# Altium PCB Board_MCU_v7.PcbDoc
Units mm, origin at the board's own origin, x right, y up, seen from the top; angles counter-clockwise.
Board outline 46.23 x 41.91 mm, 2 copper layers (Top Layer, Bottom Layer); 124 components, 95 nets, 381 pads, 5 vias.
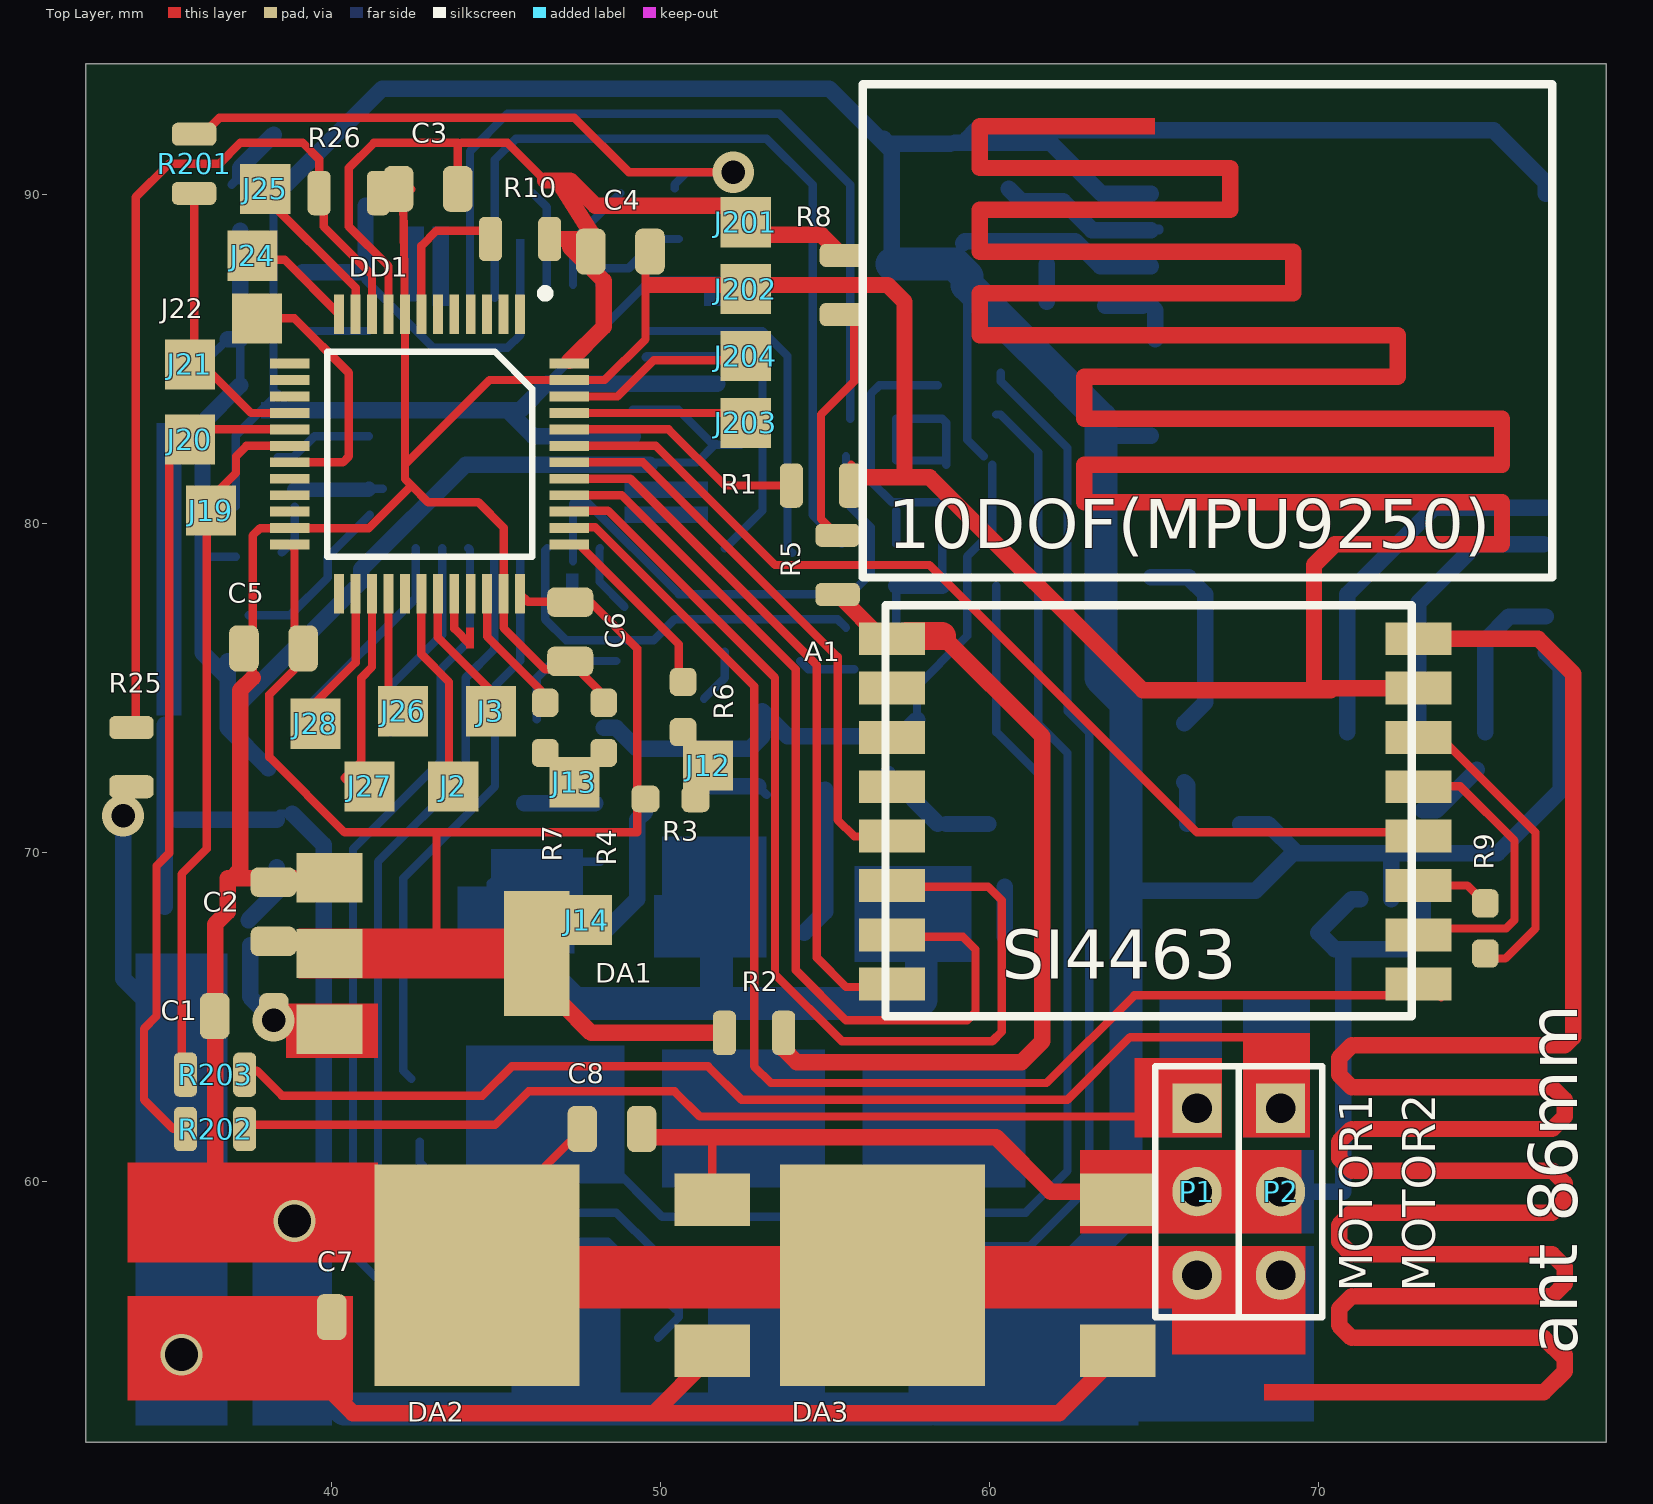
[diagram p0: Top Layer view]
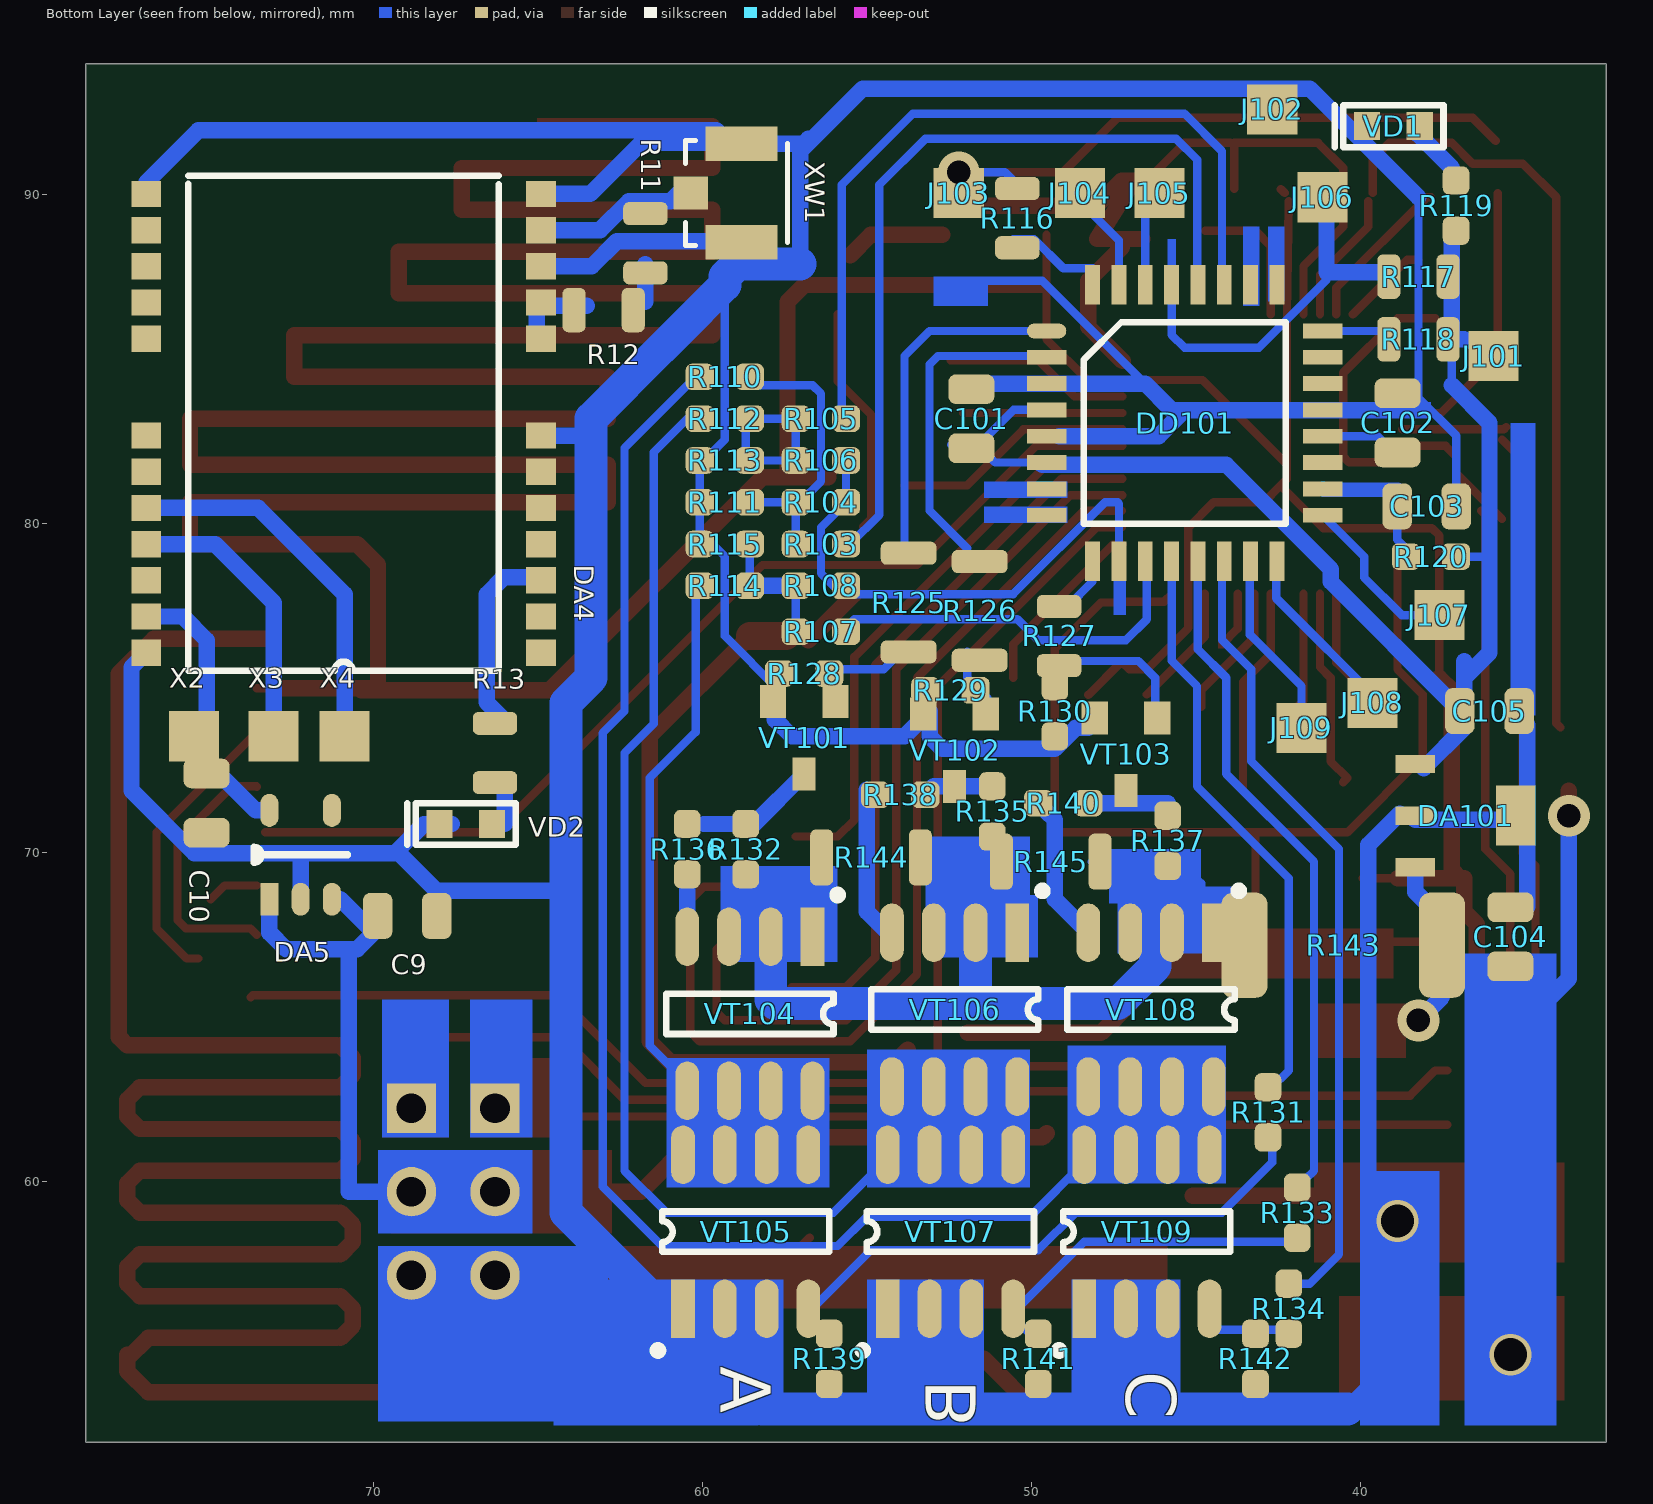
[diagram p1: Bottom Layer view, seen from below]
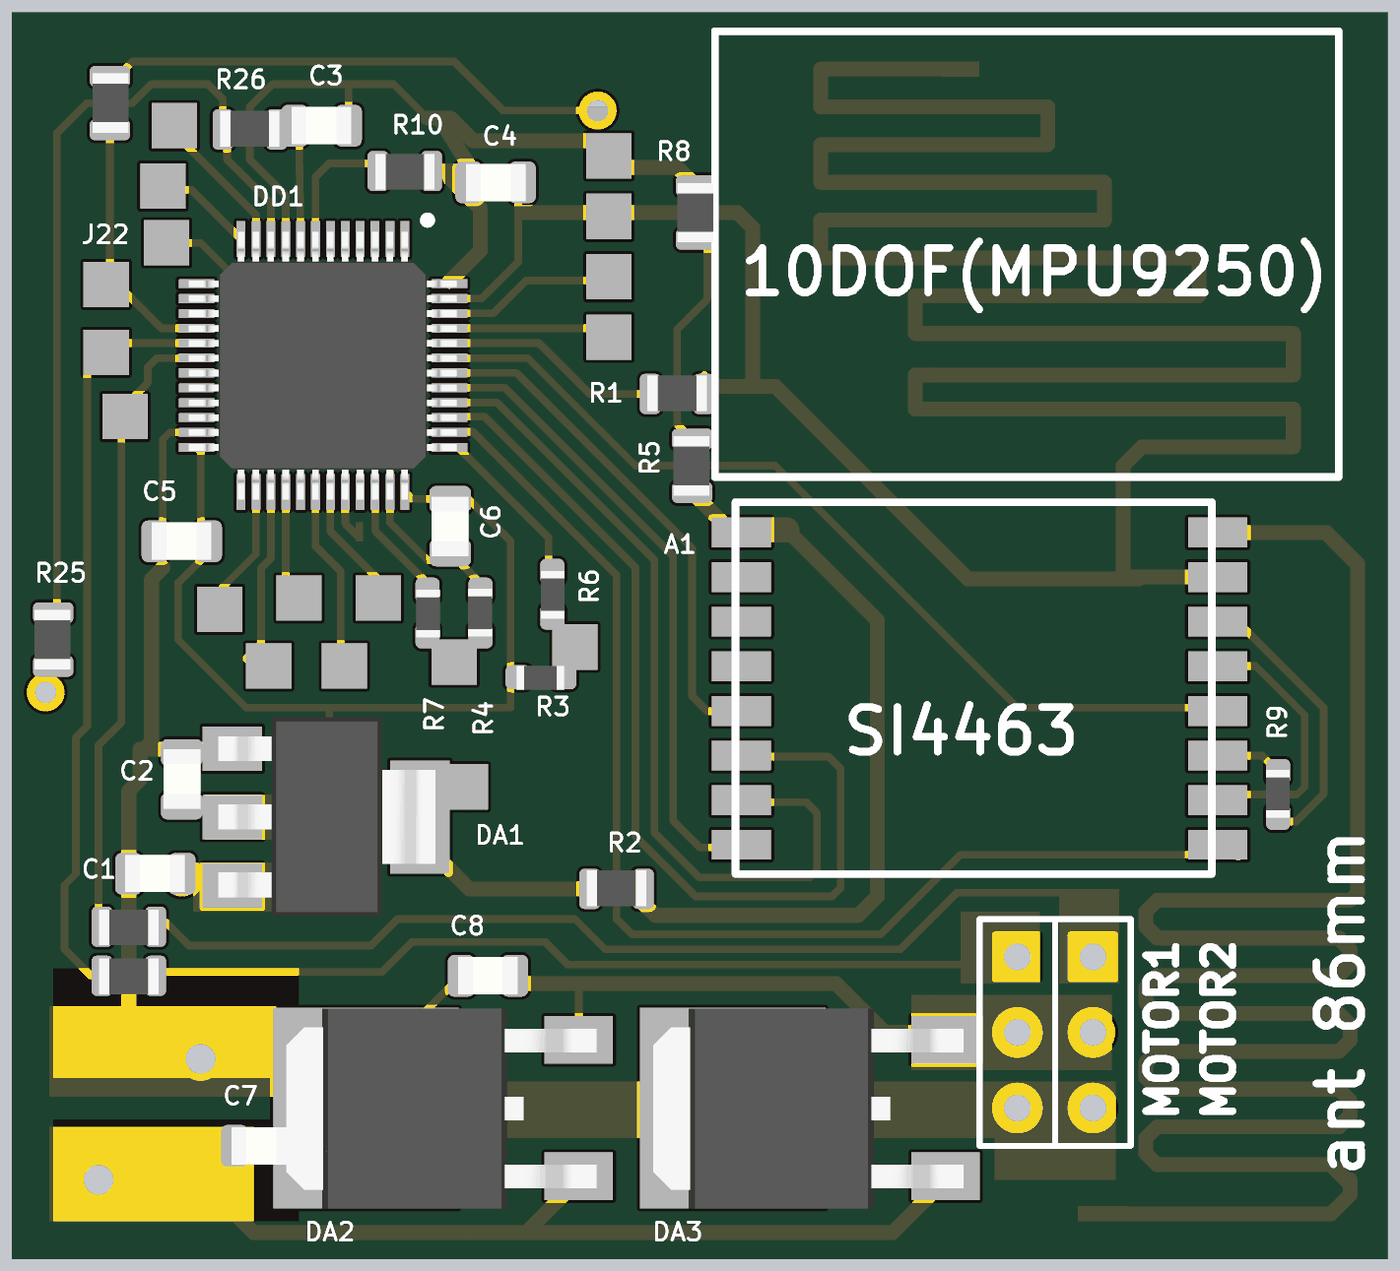
[diagram p2: 3D render of the assembled board from above, using the file's embedded part models]
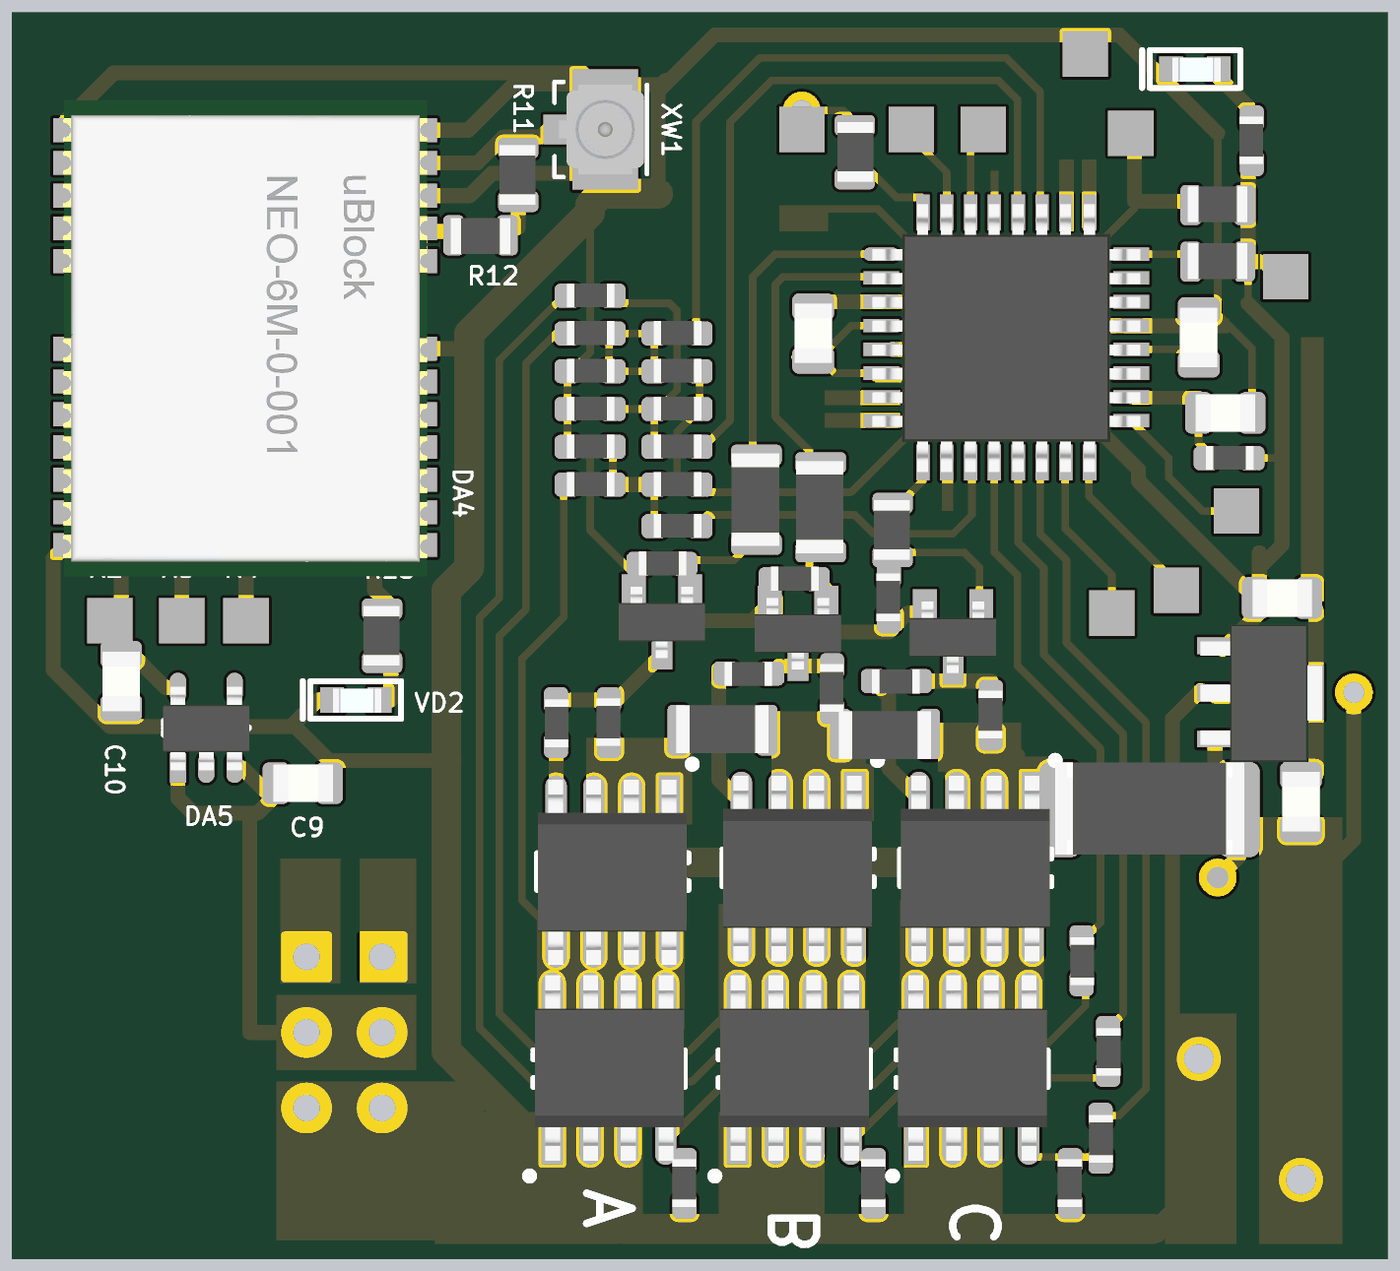
[diagram p3: 3D render of the assembled board from below, using the file's embedded part models]

## Layer stack, top to bottom
Top Layer: signal copper 0.0356
Dielectric: dielectric 0.32, FR-4, Dk 4.8
Bottom Layer: signal copper 0.0356

## Board outline
32.512,52.07 32.512,93.98 78.74,93.98 78.74,52.07

## Design rules (kind name [scope] priority, off if disabled: settings)
Clearance [All] p1: gap=0.1
ComponentClearance [All] p1 off: gap=0.254 collisioncheckmode=3 verticalgap=0.254 showdistances=FALSE
MinimumSolderMaskSliver [All] p1 off: minsoldermaskwidth=0.05
PolygonConnect [All] p1: connectstyle=Relief reliefconductorwidth=0.254 reliefentries=4 polygonreliefangle="90 Angle"
RoutingVias [All] p1: holewidth=0.711 width=1.27 viastyle="Through Hole" minholewidth=0.711 minwidth=1.27 maxholewidth=0.711 maxwidth=1.27
SilkToSilkClearance [All] p1 off: silktosilkclearance=0.254
SilkscreenOverComponentPads [IsPad] p1 off: minsilkscreentomaskgap=0.254
SolderMaskExpansion [All] p1: expansion=0.102
TestPointUsage [All] p1: valid=0 allowmultiple=FALSE
Testpoint [All] p1: side=3 testpointundercomponent=TRUE minsize=1.016 maxsize=2.54 preferedsize=1.524 minholesize=0 maxholesize=1.016 preferedholesize=0.813 testpointgrid=0.025 style=297 order=0123456789
Width [All] p1: maxlimit=2 minlimit=0.254 preferedwidth=0.5
20 further rules are at their usual default settings.

## Classes and differential pairs
component class ESC: C101 C102 C103 C104 C105 DA101 DD101 J101 J102 J103 J104 J105 J106 J107 J108 J109 R103 R104 R105 R106 R107 R108 R110 R111 R112 R113 R114 R115 R116 R117 R118 R119 R120 R125 R126 R127 R128 R129 R130 R131 R132 R133 R134 R135 R136 R137 R138 R139 R140 R141 R142 R143 R144 R145 VD1 VT101 VT102 VT103 VT104 VT105 VT106 VT107 VT108 VT109
component class Board_MCU: A1 C1 C2 C3 C4 C5 C6 DA1 DD1 J2 J3 J12 J13 J14 J19 J20 J21 J22 J24 J25 J26 J27 J28 J201 J202 J203 J204 P1 P2 R1 R2 R3 R4 R5 R6 R7 R8 R9 R10 R25 R26 R201 R202 R203
component class BatteryProtection: C7 C8 C9 C10 DA2 DA3 DA4 DA5 R11 R12 R13 VD2 X2 X3 X4 XW1

## Components (designator, comment, footprint, x,y, rotation, side; value= is the part's Value field where it differs from the comment)
A1 "Module SI4463" MODULE_SI44663 65.024,71.247 r0 top
C1 "1uF" CAP0805 37.338,65.024 r180 top
C2 "1uF" CAP0805 38.227,68.199 r90 top
C3 "0.1uF" CAP0805 42.926,90.17 r180 top
C4 "0.1uF" CAP0805 48.768,88.265 r0 top
C5 "0.1uF" CAP0805 38.227,76.2 r180 top
C6 "0.1uF" CAP0805 47.244,76.708 r270 top
C7 "0.33uF" CAP0805 40.894,55.88 r0 top
C8 "0.1uF" CAP0805 48.514,61.595 r180 top
C9 "0.1uF" CAP0805 68.961,68.072 r180 bottom
C10 "0.1uF" CAP0805 75.057,71.501 r270 bottom
C101 "0.1uF" CAP0805 51.816,83.185 r90 bottom
C102 "0.1uF" CAP0805 38.862,83.058 r270 bottom
C103 "0.1uF" CAP0805 37.973,80.518 r180 bottom
C104 "0.1uF" CAP0805 35.433,67.437 r90 bottom
C105 "0.1uF" CAP0805 36.068,74.295 r180 bottom
DA1 "AMS1117-3.3" SOT-223 46.228,66.929 r270 top
DA2 "L78L05" TO-252AA 51.562,57.15 r90 top
DA3 "L78L05" TO-252AA 63.881,57.15 r90 top
DA4 "DA-NEO-6M" NEO-6M 64.897,76.073 r0 bottom
DA5 "LP2985AIM-3.3" SOT-23 73.152,68.58 r90 bottom
DA101 "L78L05" SOT89 37.719,71.12 r270 bottom
DD1 "STM32F103C8T6" STM32L151C 45.72,86.36 r270 top
DD101 "ATmega8a" ATMEGA8A 49.53,85.852 r180 bottom
J2 "X-Socket" Socket 43.688,72.009 r0 top
J3 "X-Socket" Socket 44.831,74.295 r0 top
J12 "X-Socket" Socket 51.435,72.644 r0 top
J13 "X-Socket" Socket 47.371,72.136 r0 top
J14 "X-Socket" Socket 47.752,67.945 r0 top
J19 "X-Socket" Socket 36.322,80.391 r0 top
J20 "X-Socket" Socket 35.687,82.55 r0 top
J21 "X-Socket" Socket 35.687,84.836 r0 top
J22 "X-Socket" Socket 37.719,86.233 r90 top
J24 "X-Socket" Socket 37.592,88.138 r0 top
J25 "X-Socket" Socket 37.973,90.17 r0 top
J26 "X-Socket" Socket 42.164,74.295 r0 top
J27 "X-Socket" Socket 41.148,72.009 r0 top
J28 "X-Socket" Socket 39.497,73.914 r0 top
J101 "X-Socket" Socket 35.941,85.09 r180 bottom
J102 "X-Socket" Socket 42.672,92.583 r180 bottom
J103 "X-Socket" Socket 52.197,90.043 r180 bottom
J104 "X-Socket" Socket 48.514,90.043 r180 bottom
J105 "X-Socket" Socket 46.101,90.043 r270 bottom
J106 "X-Socket" Socket 41.148,89.916 r90 bottom
J107 "X-Socket" Socket 37.592,77.216 r270 bottom
J108 "X-Socket" Socket 39.624,74.549 r270 bottom
J109 "X-Socket" Socket 41.783,73.787 r0 bottom
J201 "X-Socket" Socket 52.578,89.154 r90 top
J202 "X-Socket" Socket 52.578,87.122 r90 top
J203 "X-Socket" Socket 52.578,83.058 r90 top
J204 "X-Socket" Socket 52.578,85.09 r90 top
P1 "Header 3" HDR1X3 66.294,62.23 r270 top
P2 "Header 3" HDR1X3 68.834,62.23 r270 top
R1 "10k" RES0805 54.864,81.153 r0 top
R2 "0" RES0805 52.832,64.516 r0 top
R3 "10k N/C" RES0603 50.292,71.628 r180 top
R4 "10k N/C" RES0603 48.26,73.787 r90 top
R5 "0" RES0805 55.372,78.74 r90 top
R6 "150" RES0603 50.673,74.422 r270 top
R7 "150" RES0603 46.482,73.787 r270 top
R8 "0" RES0805 55.499,87.249 r90 top
R9 "0" RES0603 75.057,67.691 r90 top
R10 "1k" RES0805 45.72,88.646 r180 top
R11 "10k" RES0805 61.722,88.519 r90 bottom
R12 "10k" RES0805 62.992,86.487 r0 bottom
R13 "10k" RES0805 66.294,73.025 r90 bottom
R25 "10k" RES0805 33.909,72.898 r90 top
R26 "1k" RES0805 40.513,90.043 r0 top
R103 "33k" RES0603 56.388,79.375 r180 bottom
R104 "33k" RES0603 56.388,80.645 r180 bottom
R105 "33k" RES0603 56.388,83.185 r180 bottom
R106 "33k" RES0603 56.388,81.915 r180 bottom
R107 "33k" RES0603 56.388,76.708 r180 bottom
R108 "33k" RES0603 56.388,78.105 r180 bottom
R110 "33k" RES0603 59.309,84.455 r180 bottom
R111 "12k" RES0603 59.309,80.645 r180 bottom
R112 "33k" RES0603 59.309,83.185 r180 bottom
R113 "12k" RES0603 59.309,81.915 r180 bottom
R114 "33k" RES0603 59.309,78.105 r180 bottom
R115 "12k" RES0603 59.309,79.375 r180 bottom
R116 "100" RES0805 50.419,89.281 r270 bottom
R117 "10k" RES0805 38.227,87.503 r180 bottom
R118 "10k" RES0805 38.227,85.598 r180 bottom
R119 "1k" RES0603 37.084,89.662 r90 bottom
R120 "100" RES0603 37.846,78.994 r180 bottom
R125 "0" RES1206 53.721,77.597 r90 bottom
R126 "0" RES1206 51.562,77.343 r90 bottom
R127 "0" RES0805 49.149,76.581 r90 bottom
R128 "10K" RES0603 56.896,75.438 r180 bottom
R129 "10K" RES0603 52.451,74.93 r180 bottom
R130 "10K" RES0603 49.276,74.295 r90 bottom
R131 "100" RES0603 42.799,62.103 r270 bottom
R132 "2k" RES0603 58.674,70.104 r90 bottom
R133 "100" RES0603 41.91,59.055 r270 bottom
R134 "100" RES0603 42.164,56.134 r270 bottom
R135 "2k" RES0603 51.181,71.247 r90 bottom
R136 "100" RES0603 60.452,70.104 r270 bottom
R137 "2k" RES0603 45.847,70.358 r90 bottom
R138 "100" RES0603 53.975,71.755 r0 bottom
R139 "10K" RES0603 56.134,54.61 r90 bottom
R140 "100" RES0603 49.022,71.501 r0 bottom
R141 "10K" RES0603 49.784,54.61 r90 bottom
R142 "10K" RES0603 43.18,54.61 r90 bottom
R143 "0" RES2512 40.513,67.183 r180 bottom
R144 "0" RES1206 54.864,69.85 r180 bottom
R145 "0" RES1206 49.403,69.723 r0 bottom
R201 "1k" RES0805 35.814,90.932 r270 top
R202 "1k" RES0805 36.449,61.595 r180 top
R203 "1k" RES0805 36.449,63.246 r180 top
VD1 "KP-1608SURC" "DIODE 1608" 38.989,92.075 r180 bottom
VD2 "KP-1608SURC" "Diode 1608" 67.183,70.866 r180 bottom
VT101 "2N7002" SOT23 56.896,72.39 r0 bottom
VT102 "2N7002" SOT23 52.324,72.009 r0 bottom
VT103 "2N7002" SOT23 47.117,71.882 r0 bottom
VT104 "IRF9310PbF" "SO-8 IRF..." 56.642,67.437 r270 bottom
VT105 "IRF8736PbF" "SO-8 IRF..." 60.579,56.134 r90 bottom
VT106 "IRF9310PbF" "SO-8 IRF..." 50.419,67.564 r270 bottom
VT107 "IRF8736PbF" "SO-8 IRF..." 54.356,56.134 r90 bottom
VT108 "IRF9310PbF" "SO-8 IRF..." 44.45,67.564 r270 bottom
VT109 "IRF8736PbF" "SO-8 IRF..." 48.387,56.134 r90 bottom
X2 "X-Socket" Socket 75.438,73.533 r180 bottom
X3 "X-Socket" Socket 73.025,73.533 r180 bottom
X4 "X-Socket" Socket 70.866,73.533 r180 bottom
XW1 "X-MMCX Connector Jack" X-MMCX 58.801,90.043 r90 bottom

## Footprints (in the part's own frame and the unit in brackets; to place one, negate y for a bottom-side part, rotate by r counter-clockwise, add the part's x,y. Pads: shape width x height; smd on the part's side, far side on the other; paste and mask are expansions set on the pad)
ATMEGA8A [mm]
  oval 1.2x0.45 smd: 1(0,0)
  rect 1.2x0.45 smd: 2(0,-0.8) 3(0,-1.6) 4(0,-2.4) 5(0,-3.2) 6(0,-4) 7(0,-4.8) 8(0,-5.6) 17(8.4,-5.6) 18(8.4,-4.8) 19(8.4,-4) 20(8.4,-3.2) 21(8.4,-2.4) 22(8.4,-1.6) 23(8.4,-0.8) 24(8.4,0)
  rect 0.45x1.2 smd: 9(1.4,-7) 10(2.2,-7) 11(3,-7) 12(3.8,-7) 13(4.6,-7) 14(5.4,-7) 15(6.2,-7) 16(7,-7) 25(7,1.4) 26(6.2,1.4) 27(5.4,1.4) 28(4.6,1.4) 29(3.8,1.4) 30(3,1.4) 31(2.2,1.4) 32(1.4,1.4)
  silkscreen extent 1.13,-5.87 7.27,0.27, body extent -0.3,-7.32 8.7,1.68, height 1.6
CAP0805 [mm]
  rrect50% 0.9x1.4 smd: 1(-0.9,0) 2(0.9,0)
  body extent -0.99,-0.63 1.01,0.62, height 1.3
"DIODE 1608" [mm]
  rect 0.8x0.85 smd: 1(-0.8,0) 2(0.8,0)
  silkscreen extent -1.78,-0.64 1.52,0.64, body extent -0.77,-0.42 0.85,0.38, height 1.1
"Diode 1608" [mm]
  rect 0.8x0.85 smd: 1(-0.8,0) 2(0.8,0)
  silkscreen extent -1.78,-0.64 1.52,0.64, body extent -0.77,-0.42 0.85,0.38, height 1.1
HDR1X3 [mm] "Connector; Header; 3 Position"
  rect 1.5x1.5 hole 0.9: 1(0,0)
  round 1.5 hole 0.9: 2(2.54,0) 3(5.08,0)
  silkscreen extent -1.27,-1.27 6.35,1.27
MODULE_SI44663 [mm]
  rect 2x1 smd: 1(-8,5.25) 2(-8,3.75) 3(-8,2.25) 4(-8,0.75) 5(-8,-0.75) 6(-8,-2.25) 7(-8,-3.75) 8(-8,-5.25) 9(8,-5.25) 10(8,-3.75) 11(8,-2.25) 12(8,-0.75) 13(8,0.75) 14(8,2.25) 15(8,3.75) 16(8,5.25)
  silkscreen extent -8.2,-6.23 7.8,6.27, body extent -8.2,-6.23 7.79,6.25, height 2
NEO-6M [mm]
  rect 0.9x0.8 smd: 1(0,0) 2(0,-1.1) 3(0,-2.2) 4(0,-3.3) 5(0,-4.4) 6(0,-5.5) 7(0,-6.6) 8(0,-9.544) 9(0,-10.644) 10(0,-11.744) 11(0,-12.844) 12(0,-13.944) 13(12,-13.944) 14(12,-12.844) 15(12,-11.744) 16(12,-10.644) 17(12,-9.544) 18(12,-6.6) 19(12,-5.5) 20(12,-4.4) 21(12,-3.3) 22(12,-2.2) 23(12,-1.1) 24(12,0)
  silkscreen extent 1.28,-14.49 10.72,0.55, body extent -0.12,-14.95 12.1,1.05, height 2.4
RES0603 [mm]
  rrect50% 0.86x0.81 smd: 1(-0.762,0) 2(0.762,0)
  body extent -0.78,-0.38 0.82,0.42, height 0.45
RES0805 [mm]
  rrect50% 0.7x1.35 smd: 1(-0.9,0) 2(0.9,0)
  body extent -1,-0.58 1,0.62, height 0.5
RES1206 [mm]
  rrect50% 0.7x1.7 smd: 1(-1.5,0) 2(1.5,0)
  body extent -1.55,-0.76 1.55,0.84, height 0.55
RES2512 [mm]
  rrect50% 1.4x3.2 smd: 1(-3,0) 2(3,0)
  body extent -3.17,-1.52 3.18,1.58, height 0.55
"SO-8 IRF..." [mm]
  rect 1.78x0.72 smd: 1(0,0)
  oval 1.78x0.72 smd: 2(0,-1.27) 3(0,-2.54) 4(0,-3.81) 5(4.68,-3.81) 6(4.68,-2.54) 7(4.68,-1.27) 8(4.68,0)
  silkscreen extent -1.4,-4.45 2.96,0.89, body extent -0.75,-4.42 5.48,0.58, height 1.75
Socket [mil]
  rect 60x60 smd: 1(0,0)
SOT23 [mm]
  rect 0.8x1 smd: 1(-0.95,-2.2) 2(0.95,-2.2)
  rect 0.7x1 smd: 3(0,0)
  body extent -1.44,-2.29 1.46,0.11, height 1.02
SOT89 [mm]
  rect 0.56x1.2 smd: 1(-1.57,-0.6) 2(0,-0.6) 3(1.57,-0.6)
  rect 1.83x1.2 smd: 2(0,2.45)
  body extent -2.27,-1.09 2.33,3.01, height 1.6
SOT-23 [mm]
  rect 1x0.55 smd: 1(0,0)
  oval 1x0.55 smd: 2(0,-0.95) 3(0,-1.9) 4(2.7,-1.9) 5(2.7,0)
  silkscreen extent 1.11,-2.38 1.59,0.48, body extent -0.07,-2.4 2.73,0.5, height 1.45
SOT-223 [mm]
  rect 1.5x2 smd: 1(-2.3,-6.3) 2(0,-6.3) 3(2.3,-6.3)
  rect 3.8x2 smd: 4(0,0)
  body extent -3.36,-6.77 3.35,0.52, height 1.8
STM32L151C [mm]
  rect 1.2x0.3 smd: 1(0,0) 2(0,-0.5) 3(0,-1) 4(0,-1.5) 5(0,-2) 6(0,-2.5) 7(0,-3) 8(0,-3.5) 9(0,-4) 10(0,-4.5) 11(0,-5) 12(0,-5.5) 25(8.5,-5.5) 26(8.5,-5) 27(8.5,-4.5) 28(8.5,-4) 29(8.5,-3.5) 30(8.5,-3) 31(8.5,-2.5) 32(8.5,-2) 33(8.5,-1.5) 34(8.5,-1) 35(8.5,-0.5) 36(8.5,0)
  rect 0.3x1.2 smd: 13(1.5,-7) 14(2,-7) 15(2.5,-7) 16(3,-7) 17(3.5,-7) 18(4,-7) 19(4.5,-7) 20(5,-7) 21(5.5,-7) 22(6,-7) 23(6.5,-7) 24(7,-7) 37(7,1.5) 38(6.5,1.5) 39(6,1.5) 40(5.5,1.5) 41(5,1.5) 42(4.5,1.5) 43(4,1.5) 44(3.5,1.5) 45(3,1.5) 46(2.5,1.5) 47(2,1.5) 48(1.5,1.5)
  silkscreen extent -0.76,-5.86 7.36,0.89, body extent -0.24,-7.25 8.76,1.75, height 1.6
TO-252AA [mm]
  rect 1.6x2.3 smd: 1(-2.29,0) 3(2.29,0)
  rect 6.74x6.23 smd: 4(0,7.15)
  body extent -3.38,-0.6 3.35,9.82, height 2.38
X-MMCX [mm] "1 Position Header"
  rect 1x1.05 smd: 1(0,1.55)
  rect 1.05x2.2 smd: 2(-1.5,0) 2(1.5,0)
  silkscreen extent -1.6,-1.4 1.6,1.7, body extent -1.5,-1.3 1.5,1.55, height 1.27

## Part data
A1: library part module_SI4463
C1 C2 C3 C4 C5 C6 C7 C8 C9 C10 C101 C102 C103 C104 C105: library part Capacitor
DA1: library part DA-AMS1117, "LDO 3.3V 0.5A"
DA2 DA3: library part DA-L78M05, "LDO"
DA5: library part DA-LP2985, "LDO"
DA101: library part DA-L78L05, "LDO"
DD1: "LQFP48"
DD101: "MCU 8MHz"
P1 P2: "Header, 3-Pin"
R1 R2 R3 R4 R5 R6 R7 R8 R9 R10 R11 R12 R13 R25 R26 R103 R104 R105 R106 R107 R108 R110 R111 R112 R113 R114 R115 R116 R117 R118 R119 R120 R125 R126 R127 R128 R129 R130 R131 R132 R133 R134 R135 R136 R137 R138 R139 R140 R141 R142 R143 R144 R145 R201 R202 R203: library part Resistor
VD1 VD2: library part LED_0603
VT104 VT106 VT108: "P-MOSFET -20A"
VT105 VT107 VT109: "N-MOSFET 18A"

## Via types
v1: diameter 1.27, hole 0.711, Top Layer to Bottom Layer, 3 vias
v2: diameter 1.27, hole 1, Top Layer to Bottom Layer, 2 vias

## Nets (pads, with @x,y where several pads share a name; then routed paths per layer and width w, separated by ;. In a path a pad name is that pad's centre, name@x,y a point inside that pad or via, vN(x,y) a via of type N, cw(c..) or ccw(c..) an arc to the next point about the centre after c; other vN are vias at no path point)
3V3: C2.1 C5.1 C6.1 DA1.2 DA1.4 DD1.24 DD1.36 J14.1 R2.1 R3.2 | length 42.5
  Top Layer w0.254: C2.1@38.1,67.285 39.268,67.285 DA1.2@39.497,67.056 ; DD1.24 38.862,79.218 38.862,75.565 38.1,74.803 38.1,72.898 40.386,70.612 49.276,70.612 49.276,76.2 47.879,77.597 47.269,77.597 47.244,77.622 45.958,77.622 DD1.36 ; DA1.2@39.928,66.802 43.18,66.802 ; 43.18,66.929 43.18,70.612
  Top Layer w0.5: DA1.4@46.99,65.405 47.879,64.516 R2.1
3V3_2: C3.1 C4.1 DD1.9 DD1.48 J201.1 R8.2 R10.1 | length 31.4
  Top Layer w0.254: DD1.9 41.72,87.82 40.513,89.027 40.513,90.805 41.275,91.567 43.815,91.567 43.826,91.578 C3.1 ; 43.942,91.567 45.339,91.567 46.482,90.424 ; 47.244,88.392 C4.1@47.879,88.646 ; C4.1@47.752,88.773 47.625,88.646 C4.1@47.99,88.646
  Top Layer w0.5: R10.1 C4.1@47.879,88.646 ; DD1.48@47.22,84.939 48.26,85.979 48.26,87.376 47.244,88.392 ; C4.1@47.99,88.646 46.879,90.424 46.482,90.424 47.244,90.424 48.006,89.662 J201.1@52.197,89.662 ; J201.1@52.705,88.773 54.875,88.773 R8.2
5V_OUT: C101.1 C105.1 DA101.1 DD101.4 DD101.6 J101.1 R117.2 R118.2 R119.1 R120.2 | length 42.8
  Bottom Layer w0.254: 36.068,78.994 R120.2 ; J101.1@36.195,84.963 36.83,85.598 ; 37.211,84.201 37.211,85.598 R118.2 ; DD101.6@49.149,81.852 DD101.6 51.093,81.852 C101.1@51.664,82.423 ; DD101.4@49.149,83.452 50.533,83.452 C101.1@51.613,82.372 ; C101.1@51.689,82.398 C101.1@52.426,82.398
  Bottom Layer w0.5: 36.83,75.311 36.068,76.073 36.068,78.994 36.068,83.058 37.211,84.201 ; 36.83,75.819 36.83,73.798 DA101.1@38.065,72.563 ; 36.83,85.598 37.211,85.598 R119.1@37.211,88.9 ; C105.1@37.084,74.422 40.894,78.232 40.894,78.613 44.069,81.788 DD101.6@49.657,81.788
"+ BATT_OUT": C1.1 C7.1 C104.1 DA1.3 DA2.1 DA3.1 DA101.3 R25.1 R143.2 | length 42.5
  Top Layer w0.254: DA1.3@40.132,64.389 DA1.3@40.513,64.008
  Top Layer w0.5: v1(33.655,71.12) R25.1@33.655,71.882 ; 40.005,53.594 40.64,52.959 62.103,52.959 DA3.1@64.325,55.181 ; 49.784,52.959 51.435,54.61 DA2.1@51.562,54.61
  Bottom Layer w0.5: v1(33.655,71.12) 33.655,66.167 34.925,64.897 34.925,63.754 ; v2(35.433,54.737) 35.814,54.737 35.941,54.864 35.941,55.118 ; R143.2@37.465,67.945 38.319,68.799 DA101.3 ; R143.2 37.513,65.611 v1(38.227,64.897)
"- BATT_OUT": A1.15 C1.2 C2.2 C3.2 C4.2 C5.2 C6.2 C7.2 C8.2 C9.2 C10.2 C101.2 C102.1 C103.2 C104.2 C105.2 DA1.1 DA2.4 DA3.4 DA4.7 DA4.10 DA4.12 DA4.13 DA4.24 DA5.2 DA101.2 DD1.8 DD1.23 DD1.35 DD1.47 DD101.3 DD101.5 DD101.21 J102.1 J202.1 P1.3 P2.3 R1.2 R4.2 R26.2 R111.1 R113.1 R115.1 R128.1 R129.1 R130.1 R139.1 R141.1 R142.1 VD1.1 VD2.1 VT101.2 VT102.2 VT103.2 VT105.1 VT105.2 VT105.3 VT107.1 VT107.2 VT107.3 VT109.1 VT109.2 VT109.3 XW1.2 | length 478.2
  Top Layer w0.254: 37.592,75.311 37.592,79.629 37.823,79.86 DD1.23 41.125,79.86 42.418,81.153 ; v2@38.862,58.547 v2(38.862,58.801) ; DA1.1@38.964,69.215 DA1.1@39.928,69.215 ; C3.2@42.164,89.789 DD1.8 42.22,81.788 ; C3.2@42.291,90.043 C3.2@42.407,90.159 ; DA2.4@46.355,60.325 46.355,60.336 C8.2 ; C6.2@47.244,75.794 47.015,75.565 46.482,75.565 45.22,76.827 DD1.35 45.22,79.875 44.45,80.645 42.926,80.645 42.418,81.153 ; C6.2 R4.2@48.26,74.792 ; C4.2@49.53,88.773 49.53,85.598 48.292,84.36 DD1.47 44.792,84.36 42.22,81.788 ; R1.2@55.778,81.788 56.159,81.407 ; DA3.4@56.731,58.293 57.62,57.404 P2.3@68.453,57.404 ; A1.15 A1.15@73.532,74.997 ; 42.22,81.788 42.22,81.351 42.418,81.153
  Top Layer w0.5: 36.449,60.071 36.449,67.818 36.83,68.199 36.83,69.215 C2.2@38.862,69.215 ; 36.957,69.215 37.211,69.469 37.211,74.93 37.592,75.311 ; 39.624,59.563 DA2.4@45.085,59.563 ; DA2.4@46.99,57.404 DA3.4@58.674,57.404 ; 49.657,87.249 J202.1@52.705,87.249 ; J202.1@52.959,87.249 56.896,87.249 57.404,86.741 57.404,81.534 ; 56.159,81.407 58.166,81.407 64.643,74.93 70.358,74.93 ; 64.77,92.075 59.69,92.075 59.69,90.805 67.31,90.805 67.31,89.535 59.69,89.535 59.69,88.265 69.215,88.265 69.215,86.995 59.69,86.995 59.69,85.725 72.39,85.725 72.39,84.455 62.865,84.455 62.865,83.185 75.565,83.185 75.565,81.788 62.865,81.788 62.865,80.645 75.565,80.645 75.565,79.375 70.485,79.375 69.85,78.74 69.85,75.057 ; 70.044,74.997 A1.15
  Bottom Layer w0.254: C103.2 37.073,82.666 C102.1@38.227,83.82 ; 38.227,89.916 C102.1@38.227,83.82 ; DA101.2@38.417,71.183 DA101.2@38.798,71.183 ; C102.1@38.608,83.82 38.481,83.82 38.354,83.947 C102.1@38.227,83.82 ; 38.862,83.452 DD101.21 45.733,83.452 ; 46.494,84.252 46.533,84.252 49.657,87.376 52.451,87.376 ; VT107.3 VT107.2 VT107.1 ; VT101.2@57.658,74.93 59.309,76.581 59.309,78.994 60.071,79.756 R111.1 R113.1@60.071,81.788 ; 57.785,74.041 VT101.2@57.785,74.676 ; 59.309,87.249 59.309,82.55 R113.1@59.817,82.042
  Bottom Layer w0.5: C104.2@34.925,68.351 C105.2@34.925,73.889 ; DA101.2@35.269,70.993 DA101.2@38.319,70.993 ; 38.227,89.916 41.529,93.218 55.118,93.218 57.023,91.313 57.023,87.884 ; DA101.2@38.798,71.183 39.751,70.231 39.751,53.721 40.386,53.086 ; 45.339,83.439 46.126,82.652 DD101.5@49.149,82.652 ; 45.733,83.452 46.533,84.252 C101.2@51.715,84.252 ; VT103.2@48.26,73.787 48.641,73.787 49.276,73.152 52.705,73.152 53.086,73.533 53.086,74.295 53.848,73.533 57.277,73.533 57.785,74.041 ; 56.769,91.694 56.92,91.543 XW1.2@58.801,91.543 ; XW1.2@58.928,91.567 61.849,91.567 63.399,90.017 DA4.12 ; XW1.2@59.182,88.519 59.236,88.573 62.597,88.573 63.353,87.817 DA4.10 ; XW1.2@59.309,91.694 59.563,91.948 75.311,91.948 76.897,90.362 DA4.13 ; 63.373,82.677 63.377,82.673 DA4.7 ; 63.881,68.834 68.072,68.834 69.215,69.977 69.342,69.977 ; VD2.1@67.602,70.866 68.453,70.866 69.342,69.977 ; DA5.2 72.202,69.916 72.263,69.977 ; DA4.24 77.343,75.627 77.343,71.882 75.438,69.977 72.263,69.977 ; 69.342,69.977 72.263,69.977
  Bottom Layer w1: 40.386,53.086 58.166,53.086 64.135,59.055 64.135,74.549 63.373,75.311 63.373,82.677 63.373,83.185 61.219,85.339 61.215,85.339 60.761,85.793 60.761,85.797 59.309,87.249 ; 57.023,87.884 58.928,87.884 59.309,87.503
ADC_0: DD101.10 R104.2 R106.2 R108.2 | length 15.5
  Bottom Layer w0.254: DD101.10 47.33,80.604 47.371,80.645 47.752,80.645 50.546,77.851 R108.2@55.499,77.851 ; R104.2 R106.2 R106.2@55.626,82.042 ; R104.2@55.753,80.518 56.388,79.883 56.388,78.486 R108.2@55.88,77.978
ADC_1: DD101.11 R107.2 | length 12
  Bottom Layer w0.254: DD101.11@46.549,79.252 46.482,79.185 46.482,77.089 47.117,76.454 49.784,76.454 50.419,77.089 55.372,77.089 R107.2@55.626,76.835
ADC_2: DD101.27 R105.2 | length 24.5
  Bottom Layer w0.254: DD101.27@44.196,86.899 44.196,91.313 45.339,92.456 53.594,92.456 55.753,90.297 R105.2@55.753,83.185
ADC_3: DD101.28 R103.2 | length 26
  Bottom Layer w0.254: DD101.28@44.949,86.852 44.949,91.05 45.593,91.694 53.213,91.694 54.61,90.297 54.61,80.264 R103.2@55.499,79.375
ADCM_1: DD1.10 R25.2 R26.1 | length 27.7
  Top Layer w0.254: R25.2 34.036,73.925 34.036,89.916 35.052,90.932 36.576,90.932 37.211,91.567 39.116,91.567 39.613,91.07 R26.1 ; R26.1@39.751,89.789 39.751,89.027 41.22,87.558 DD1.10
ADCM_2: DD1.11 J25.1 | length 4.8
  Top Layer w0.254: J25.1@37.846,89.916 37.973,89.916 40.72,87.169 DD1.11
ANTENNA: A1.16 | length 86.1
  Top Layer w0.5: 68.58,53.594 76.835,53.594 77.47,54.229 77.47,54.737 ; 70.993,55.245 70.612,55.626 70.612,56.134 70.993,56.515 ; 70.993,57.785 70.612,58.166 70.612,58.674 70.993,59.055 ; 70.993,60.325 70.612,60.706 70.612,61.214 70.993,61.595 ; 70.993,62.865 70.612,63.246 70.612,63.754 70.993,64.135 ; 71.12,55.245 76.835,55.245 77.47,54.61 ; 71.12,56.515 77.089,56.515 77.47,56.896 77.47,57.404 77.089,57.785 71.12,57.785 ; 71.12,59.055 77.089,59.055 77.47,59.436 77.47,59.944 77.089,60.325 71.12,60.325 ; 71.12,61.595 77.089,61.595 77.47,61.976 77.47,62.484 77.089,62.865 71.12,62.865 ; 71.12,64.135 77.47,64.135 77.724,64.389 77.724,75.438 76.665,76.497 A1.16
I2C_CLK: DD1.45 J203.1 | length 4.9
  Top Layer w0.254: DD1.45 J203.1@52.07,83.36
I2C_SDA: DD1.46 J204.1 | length 5.7
  Top Layer w0.254: DD1.46 48.681,83.86 49.784,84.963 J204.1@52.451,84.963
MCU_BOOT0: DD1.44 R1.1 | length 7.3
  Top Layer w0.254: DD1.44 50.236,82.86 51.943,81.153 R1.1@53.848,81.153
NetA1_1: A1.1 R2.2 R5.1 | length 24.9
  Top Layer w0.5: R2.2@53.746,64.008 54.127,63.627 60.96,63.627 61.595,64.262 61.595,73.533 58.547,76.581 ; R5.1@55.372,77.851 A1.1@56.769,76.454
  Top Layer w0.85: A1.1@57.448,76.581 58.547,76.581
NetA1_10: A1.10 A1.13 | length 8.1
  Top Layer w0.254: A1.10@73.532,67.497 73.726,67.691 75.692,67.691 75.946,67.945 75.946,70.358 74.295,72.009 73.544,72.009 A1.13@73.532,71.997
NetA1_11: A1.11 R9.2 | length 1.6
  Top Layer w0.254: A1.11@73.532,68.997 74.513,68.997 R9.2@74.93,68.58
NetA1_14: A1.14 R9.1 | length 8.8
  Top Layer w0.254: A1.14@73.532,73.497 73.696,73.497 76.581,70.612 76.581,67.691 75.667,66.777 R9.1@75.311,66.777
NetC8_1: C8.1 C9.1 DA2.3 DA3.3 DA5.1 DA5.3 P1.2 P2.2 | length 36.9
  Top Layer w0.254: DA2.3@51.562,60.198 51.562,61.341
  Top Layer w0.5: C8.1@49.53,61.468 49.657,61.341 60.198,61.341 61.849,59.69 P1.2 68.326,59.69 P2.2@68.739,60.103
  Bottom Layer w0.5: P2.2 70.739,59.69 70.739,66.929 70.612,67.056 ; DA5.3 70.993,68.58 69.977,67.564 70.485,67.056 70.612,67.056 ; DA5.1 73.152,67.564 72.644,67.056 70.612,67.056
NetC10_1: C10.1 DA4.23 DA5.5 X2.1 | length 7.1
  Bottom Layer w0.5: DA5.5 73.566,71.28 C10.1@74.803,72.517 ; X2.1@75.057,73.66 75.057,76.454 75.776,77.173 DA4.23
NetC102_2: C102.2 DD101.20 | length 3
  Bottom Layer w0.254: C102.2@38.354,82.017 38.837,82.017 39.472,82.652 DD101.20
NetC103_1: C103.1 DD101.18 R120.1 | length 4.3
  Bottom Layer w0.254: R120.1@38.481,79.121 38.873,79.513 C103.1 ; DD101.18 DD101.18@41.549,81.052
  Bottom Layer w0.45: C103.1@38.862,81.026 41.104,81.026 DD101.18
NetDA4_3: DA4.3 R13.2 | length 6.1
  Bottom Layer w0.5: DA4.3@64.897,78.359 66.04,78.359 66.548,77.851 66.548,74.56 R13.2@65.913,73.925
NetDA4_8: DA4.8 DA4.9 R12.2 | length 2.6
  Bottom Layer w0.5: 63.511,86.614 64.643,86.614 64.77,86.741 65.024,86.487 DA4.8@65.024,85.598
NetDA4_11: DA4.11 R11.2 XW1.1 | length 5.1
  Bottom Layer w0.254: DA4.11@64.897,88.958 65.151,88.958 DA4.11@65.151,88.917
  Bottom Layer w0.5: XW1.1@60.579,90.17 60.96,89.789 62.23,89.789 63.102,88.917 DA4.11
NetDA4_20: DA4.20 X4.1 | length 11.3
  Bottom Layer w0.5: X4.1@70.866,73.66 70.866,77.851 73.488,80.473 DA4.20
NetDA4_21: DA4.21 X3.1 | length 8.6
  Bottom Layer w0.5: X3.1 73.025,77.597 74.803,79.375 DA4.21@76.835,79.375
NetDD1_7: DD1.7 R10.2 | length 4.3
  Top Layer w0.254: DD1.7 42.72,88.44 43.18,88.9 R10.2@44.704,88.9
NetDD1_26: DD1.26 J28.1 | length 4
  Top Layer w0.254: J28.1@39.37,74.422 40.72,75.772 DD1.26
NetDD1_27: DD1.27 J27.1 | length 6.1
  Top Layer w0.254: J27.1@40.513,72.136 40.386,72.263 40.894,72.771 40.894,75.311 41.22,75.637 DD1.27
NetDD1_28: DD1.28 J26.1 | length 3.7
  Top Layer w0.254: DD1.28 41.72,74.612 J26.1@42.037,74.295
NetDD101_24: DD101.24 R118.1 | length 1.9
  Bottom Layer w0.254: R118.1@39.243,85.852 DD101.24
NetJ12_1: J12.1 R3.1 R6.2
NetJ13_1: J13.1 R4.1 R7.2
NetJ103_1: J103.1 R116.1 R201.1 | length 19.3
  Top Layer w0.254: R201.1@35.877,91.63 36.576,92.329 47.371,92.329 49.022,90.678 v1(52.197,90.678)
  Bottom Layer w0.254: R116.1 50.419,90.297 50.8,90.678 v1(52.197,90.678)
NetP1_1: P1.1 R202.1 | length 29.6
  Top Layer w0.254: R202.1@37.349,61.722 44.958,61.722 45.974,62.738 50.419,62.738 51.181,61.976 65.278,61.976 P1.1@65.913,62.611
NetP2_1: P2.1 R203.1 | length 34.6
  Top Layer w0.254: R203.1@37.349,63.373 37.719,63.373 38.481,62.611 44.577,62.611 45.466,63.5 51.435,63.5 52.451,62.484 62.357,62.484 64.262,64.389 67.945,64.389 68.707,63.627 68.707,62.992 P2.1@68.453,62.738
NetR5_2: R5.2 R8.1 | length 7
  Top Layer w0.254: R5.2@55.105,79.896 54.864,80.137 54.864,83.312 55.88,84.328 R8.1@55.88,86.36
NetR11_1: R11.1 R12.1 | length 1.1
  Bottom Layer w0.5: 61.722,86.741 R11.1@61.722,87.873
NetR13_1: R13.1 VD2.2 | length 1.3
  Bottom Layer w0.5: R13.1@65.913,72.136 66.002,72.047 VD2.2@66.002,70.866
NetR103_1: R103.1 R104.1 R110.2 R111.2 | length 8.2
  Bottom Layer w0.254: R103.1 R104.1@57.15,80.391 ; R110.2@58.42,84.201 56.642,84.201 56.388,83.947 56.388,81.28 57.023,80.645 R104.1 R111.2@58.522,80.645
NetR105_1: R105.1 R106.1 R112.2 R113.2 | length 5.5
  Bottom Layer w0.254: R113.2 R106.1 R105.1 R112.2 58.674,83.058 R113.2@58.674,81.788
NetR107_1: R107.1 R108.1 R114.2 R115.2 | length 4.1
  Bottom Layer w0.254: R107.1 R108.1 ; R114.2 R115.2
  Bottom Layer w0.5: R108.1 R114.2
NetR119_2: R119.2 VD1.2 | length 2.1
  Bottom Layer w0.254: R119.2@36.957,90.297 R119.2@37.211,90.551
  Bottom Layer w0.5: R119.2@37.211,90.551 37.211,90.805 VD1.2@38.227,91.821
NetR125_1: R125.1 R128.2 VT101.1 | length 1.8
  Bottom Layer w0.254: R125.1@54.229,75.819 54.483,75.565 R128.2@55.88,75.565
NetR126_1: R126.1 R129.2 VT102.1 | length 1.7
  Bottom Layer w0.254: VT102.1@51.308,74.676 51.943,75.311 R126.1@51.943,76.098
NetR127_1: R127.1 R130.2 VT103.1 | length 3.9
  Bottom Layer w0.254: VT103.1@46.228,74.041 46.228,75.311 46.736,75.819 R127.1@48.641,75.819
NetR131_2: R131.2 R139.2 VT105.4 | length 16.6
  Bottom Layer w0.254: R131.2@42.672,61.214 42.672,60.579 44.196,59.055 48.641,59.055 49.784,57.912 54.864,57.912 56.642,56.134 VT105.4
NetR132_2: R132.2 R136.1 VT101.3 | length 3.7
  Bottom Layer w0.254: R132.2@58.42,70.866 R132.2
  Bottom Layer w0.5: VT101.3 R132.2@58.42,70.866 ; R132.2 59.944,70.866
NetR133_2: R133.2 R141.2 VT107.4 | length 10.6
  Bottom Layer w0.254: R133.2@41.91,58.166 48.387,58.166 50.419,56.134 VT107.4 50.546,55.88 R141.2@49.911,55.245
NetR134_2: R134.2 R142.2 VT109.4 | length 2.7
  Bottom Layer w0.254: R134.2@42.037,55.499 VT109.4@44.704,55.499
NetR135_2: R135.2 R138.1 VT102.3 | length 2.3
  Bottom Layer w0.254: R138.1@52.959,72.009 R138.1
  Bottom Layer w0.5: R135.2@51.054,72.009 VT102.3 R138.1@52.959,72.009
NetR136_2: R136.2 VT104.4 | length 1.5
  Bottom Layer w0.5: VT104.4 R136.2@60.452,68.961
NetR137_2: R137.2 R140.1 VT103.3 | length 2.2
  Bottom Layer w0.5: R137.2@45.847,71.501 R140.1@48.006,71.501
NetR138_2: R138.2 VT106.4 | length 4.8
  Bottom Layer w0.254: R138.2@54.889,72.009 R138.2@54.991,71.907
  Bottom Layer w0.5: VT106.4@54.356,67.564 54.991,68.199 R138.2@54.991,71.907
NetR140_2: R140.2 VT108.4 | length 4.2
  Bottom Layer w0.5: VT108.4 49.276,68.58 49.276,70.993 R140.2@49.53,71.247
OUT_A0: DD101.12 R131.1 | length 17.3
  Bottom Layer w0.254: R131.1@42.418,63.119 42.164,63.373 42.164,69.215 44.958,72.009 44.958,75.057 45.73,75.829 DD101.12
OUT_A1: DD101.1 R125.2 | length 10.5
  Bottom Layer w0.254: DD101.1@49.657,85.852 53.086,85.852 53.848,85.09 53.848,79.248 R125.2@53.988,79.108
OUT_B0: DD101.13 R133.1 | length 20.5
  Bottom Layer w0.254: R133.1@41.656,60.071 41.402,60.325 41.402,69.723 44.069,72.39 44.069,75.311 44.93,76.172 44.93,77.089 ; 44.93,76.934 44.93,77.089 ; DD101.13 44.93,77.089
OUT_B1: DD101.2 R126.2 | length 9.7
  Bottom Layer w0.254: DD101.2 49.568,85.09 52.832,85.09 53.086,84.836 53.086,80.391 51.943,79.248
OUT_C0: DD101.14 R134.1 | length 24.9
  Bottom Layer w0.254: R134.1 41.529,56.896 40.64,57.785 40.64,70.104 43.307,72.771 43.307,75.565 44.196,76.454 44.196,79.205 DD101.14@44.149,79.252
OUT_C1: DD101.9 R127.2 | length 2.1
  Bottom Layer w0.254: DD101.9@48.149,79.252 48.133,79.236 48.133,78.232 R127.2@48.895,77.47
PIN_OUT: DD101.32 R116.2 | length 3.3
  Bottom Layer w0.254: DD101.32 48.13,87.754 48.133,87.757 49.022,87.757 49.911,88.646 R116.2@50.546,88.646
PIN_SET: DD1.12 J24.1 | length 2.7
  Top Layer w0.254: J24.1@38.227,88.011 38.569,88.011 DD1.12
POINT_A: R114.1 VT104.5 VT104.6 VT104.7 VT104.8 VT105.5 VT105.6 VT105.7 VT105.8 | length 22.9
  Bottom Layer w0.254: VT105.5 58.274,60.814 61.595,64.135 61.595,72.263 60.198,73.66 R114.1@60.198,78.105 ; VT104.7@58.039,62.992 VT104.5@60.198,62.992
POINT_B: R112.1 VT106.5 VT106.6 VT106.7 VT106.8 VT107.5 VT107.6 VT107.7 VT107.8 | length 41.7
  Bottom Layer w0.254: VT107.5 VT107.6 VT107.7 54.248,60.814 56.007,59.055 61.087,59.055 62.357,60.325 62.357,73.025 61.468,73.914 61.468,82.169 60.325,83.312 R112.1@60.198,83.312 ; VT106.7@51.816,62.992 54.356,62.992 VT107.8
POINT_C: R110.1 VT108.5 VT108.6 VT108.7 VT108.8 VT109.5 VT109.6 VT109.7 VT109.8 | length 48.1
  Bottom Layer w0.254: VT109.5 VT109.6 VT109.7 VT109.8 VT109.8@48.387,60.579 ; VT108.7@45.847,63.119 VT108.6@47.117,63.119 ; 47.879,60.579 VT109.8@48.387,60.579 ; VT109.8@48.641,60.814 VT109.8@48.661,60.814 ; R110.1@60.325,84.582 60.325,84.328 62.357,82.296 62.357,74.295 63.023,73.629 63.023,59.848 61.214,58.039 55.88,58.039 54.991,58.928 50.038,58.928 VT109.8@48.387,60.579
PORT_B6: DD101.7
PORT_B7: DD101.8
PORT_C2: DD101.25
PORT_C3: DD101.26
PRG_MISO: DD101.16 J108.1 | length 6
  Bottom Layer w0.254: J108.1@39.37,74.549 42.549,77.728 DD101.16@42.549,79.252
PRG_MOSI: DD101.15 J109.1 | length 6.2
  Bottom Layer w0.254: J109.1@41.783,73.66 41.783,75.057 43.349,76.623 DD101.15@43.349,79.252
PRG_RST: DD101.29 J106.1 R117.1 | length 11.4
  Bottom Layer w0.254: 41.021,87.63 41.021,87.397 43.074,85.344 45.339,85.344 45.73,85.735 DD101.29
  Bottom Layer w0.5: R117.1@39.116,87.63 41.021,87.63 J106.1@41.021,89.662
PRG_SCK: DD101.17 J107.1 | length 5.3
  Bottom Layer w0.254: J107.1@37.465,77.216 38.735,77.216 39.878,78.359 39.878,78.994 DD101.17@41.148,80.264
RXD: DD101.30 J105.1 | length 3
  Bottom Layer w0.254: J105.1 46.53,89.614 DD101.30
SI_IRQ: A1.5 DD1.42 | length 17.5
  Top Layer w0.254: DD1.42 49.458,81.86 55.372,75.946 55.372,70.993 55.88,70.485 A1.5@57.15,70.485
SI_SDN: A1.12 DD1.43 | length 30.9
  Top Layer w0.254: DD1.43 49.847,82.36 53.467,78.74 58.166,78.74 66.294,70.612 A1.12@73.279,70.612
SI_SEL: A1.9 DD1.38 | length 41.4
  Top Layer w0.254: DD1.38@47.244,79.883 48.006,79.883 52.832,75.057 52.832,63.5 53.34,62.992 61.722,62.992 64.389,65.659 73.66,65.659 A1.9@73.724,65.596
SPI1_MISO: A1.7 DD1.40 | length 29.2
  Top Layer w0.254: DD1.40 48.768,80.86 ; 48.807,80.86 54.102,75.565 54.102,66.421 55.626,64.897 59.309,64.897 59.563,65.151 59.563,67.056 59.182,67.437 A1.7@56.769,67.437
SPI1_MOSI: A1.8 DD1.41 | length 21.7
  Top Layer w0.254: DD1.41 49.069,81.36 54.737,75.692 54.737,66.802 55.626,65.913 A1.8@57.277,65.913
SPI1_SCK: A1.6 DD1.39 | length 32.3
  Top Layer w0.254: DD1.39@47.244,80.391 48.387,80.391 53.467,75.311 53.467,66.294 55.499,64.262 60.071,64.262 60.361,64.552 60.361,68.544 59.944,68.961 A1.6@57.404,68.961
SWCLK: DD1.37 R6.1 | length 5.6
  Top Layer w0.254: DD1.37 47.513,79.36 50.546,76.327 R6.1@50.546,75.311
SWDIO: DD1.34 R7.1 | length 3.8
  Top Layer w0.254: DD1.34 44.72,76.565 R7.1@46.482,74.803
TIM1: DD1.16 J21.1 R201.2 | length 8.7
  Top Layer w0.254: J21.1@35.814,84.963 J21.1@35.814,85.09 ; R201.2 J21.1@35.814,85.09 ; DD1.16 37.544,83.36 J21.1@35.814,85.09
TIM2: DD1.17 J20.1 R202.2 | length 25.1
  Top Layer w0.254: 35.179,61.595 34.29,62.484 34.29,64.643 34.671,65.024 34.671,69.596 35.052,69.977 35.052,81.915 J20.1 ; J20.1@35.56,82.931 35.631,82.86 DD1.17
TIM3: DD1.18 J19.1 R203.2 | length 21.3
  Top Layer w0.254: R203.2@35.433,63.754 35.433,69.342 36.195,70.104 36.195,80.264 J19.1 ; J19.1@35.687,80.137 37.084,81.534 37.084,82.042 37.402,82.36 DD1.18
TIM4: DD1.19 J22.1 | length 7.9
  Top Layer w0.254: J22.1 38.862,86.233 40.513,84.582 40.513,82.042 40.331,81.86 DD1.19
TIM_DOP: DD1.32 | length 1.7
  Top Layer w0.254: DD1.32 43.72,76.803 44.196,76.327
TXD: DD101.31 J104.1 | length 3.4
  Bottom Layer w0.254: DD101.31 47.33,88.605 J104.1@48.768,90.043
UART_RX: DD1.31 J3.1 | length 4.1
  Top Layer w0.254: DD1.31 43.22,76.541 44.831,74.93 J3.1@44.831,74.422
UART_TX: DD1.30 J2.1 | length 6.3
  Top Layer w0.254: DD1.30 42.72,76.025 43.561,75.184 J2.1@43.561,71.882
V_DIV: DD101.23
VCC1: R132.1 R135.1 R137.1 R143.1 R144.1 R144.2 R145.1 R145.2 VT104.1 VT104.2 VT104.3 VT106.1 VT106.2 VT106.3 VT108.1 VT108.2 VT108.3 | length 31.1
  Bottom Layer w0.254: 44.831,68.326 44.831,69.063 45.491,69.723 R145.1@48.158,69.723 ; VT106.2 51.807,67.682 51.943,67.818 51.943,70.206 ; 56.007,67.799 56.134,67.672 VT104.3@59.182,67.672 ; 58.674,67.818 R132.1@58.674,69.19 ; VT104.3@58.903,67.951 VT104.3@59.182,67.672 ; VT104.3 VT104.3@59.182,67.672 ; VT104.3@59.309,67.672 VT104.3@59.182,67.672
  Bottom Layer w1: 46.228,68.199 46.228,66.548 47.371,65.405 51.689,65.405 ; VT106.2@51.435,68.053 51.807,67.682 VT106.2@51.816,67.672 ; VT106.2 51.689,65.405 ; VT104.2@58.166,67.564 57.912,67.31 57.912,65.532 57.785,65.405 51.689,65.405
pads on no net: A1.2 A1.3 A1.4 DA4.1 DA4.2 DA4.4 DA4.5 DA4.6 DA4.14 DA4.15 DA4.16 DA4.17 DA4.18 DA4.19 DA4.22 DA5.4 DD1.1 DD1.2 DD1.3 DD1.4 DD1.5 DD1.6 DD1.13 DD1.14 DD1.15 DD1.20 DD1.21 DD1.22 DD1.25 DD1.29 DD1.33 DD101.19 DD101.22

## Other copper
Top Layer:
  rectangle net TIM_DOP: 44.069,76.2 44.323,76.835
  rectangle net "- BATT_OUT": 63.754,91.821 65.024,92.329
  rectangle net "+ BATT_OUT": 38.608,63.754 41.402,65.405
  rectangle net 3V3: 38.989,66.167 46.736,67.691
  rectangle net "+ BATT_OUT": 33.782,53.34 40.64,56.515
  rectangle net "- BATT_OUT": 33.782,57.531 41.402,60.579
  rectangle net ANTENNA: 68.326,53.34 69.977,53.848
  rectangle net NetC8_1: 62.738,58.42 69.469,60.96
  rectangle net "- BATT_OUT": 45.847,56.134 69.596,58.039
  rectangle net "- BATT_OUT": 65.532,54.737 69.596,58.039
  rectangle net NetP2_1: 67.691,61.341 69.723,64.516
  rectangle net NetP1_1: 64.389,61.341 67.056,63.754
Bottom Layer:
  rectangle net "- BATT_OUT": 58.293,52.578 64.516,57.023
  rectangle net NetP1_1: 65.151,61.341 67.056,65.532
  rectangle net NetP2_1: 67.691,61.341 69.723,65.532
  rectangle net "- BATT_OUT": 62.865,52.705 69.85,58.039
  rectangle net NetC8_1: 65.151,58.42 69.85,60.96
  rectangle net "- BATT_OUT": 37.592,52.578 40.005,60.325
  region net "+ BATT_OUT": 34.036,66.929 34.036,52.578 36.83,52.578 36.83,66.929
  region net "- BATT_OUT": 57.531,57.023 57.531,53.086 61.087,53.086 61.087,57.023
  region net "- BATT_OUT": 51.435,57.023 51.435,53.34 54.991,53.34 54.991,57.023
  region net "- BATT_OUT": 45.466,57.023 45.466,53.213 48.768,53.213 48.768,57.023
  region net PORT_C2: 42.291,89.027 42.291,86.741 42.799,86.741 42.799,89.027
  region net "- BATT_OUT": 34.671,83.058 34.671,74.168 35.433,74.168 35.433,83.058
  region net PORT_C3: 43.053,89.027 43.053,86.614 43.561,86.614 43.561,89.027
  region net POINT_B: 50.038,64.008 50.038,59.817 54.991,59.817 54.991,64.008
  region net POINT_A: 56.134,63.754 56.134,59.817 61.087,59.817 61.087,63.754
  region net VCC1: 50.038,70.485 50.038,67.818 53.213,67.818 53.213,70.485
  region net VCC1: 49.784,68.707 49.784,66.802 53.213,66.802 53.213,68.707
  region net POINT_C: 44.069,64.135 44.069,59.944 48.895,59.944 48.895,64.135
  region net POINT_A: 56.261,61.722 56.261,59.817 57.531,59.817 57.531,61.722
  region net VCC1: 43.815,68.961 43.815,66.929 47.371,66.929 47.371,68.961
  region net VCC1: 55.88,69.596 55.88,66.675 59.436,66.675 59.436,69.596
  region net ADC_0: 47.117,78.486 47.117,77.216 47.498,77.216 47.498,78.486
  region net PRG_RST: 45.593,88.646 45.593,86.614 45.847,86.614 45.847,88.646
  region net "- BATT_OUT": 37.846,83.693 37.846,83.185 45.847,83.185 45.847,83.693
  region net "- BATT_OUT": 51.308,87.503 51.308,86.614 52.959,86.614 52.959,87.503
  region net VCC1: 44.831,70.104 44.831,68.453 47.625,68.453 47.625,70.104
  region net PORT_B7: 48.895,80.518 48.895,80.01 51.435,80.01 51.435,80.518
  region net PORT_B6: 48.895,81.28 48.895,80.772 51.435,80.772 51.435,81.28

## Silkscreen, mask and mechanical layers (free items; w line width, h text height)
Top Overlay:
  lines w0.254: 56.134,78.359 77.089,78.359 77.089,93.345 56.134,93.345 56.134,78.359
  text "10DOF(MPU9250)" at 56.896,79.248 h1.5
  text "SI4463" at 60.361,66.167 h1.5
  text "MOTOR1" at 71.628,56.642 h1 r90
  text "MOTOR2" at 73.533,56.642 h1 r90
  text "ant 86mm" at 77.851,54.737 h1.5 r90
Bottom Overlay:
  text "C" at 45.593,54.229 h1.52 r270
  text "B" at 51.689,53.975 h1.52 r270
  text "A" at 59.436,52.959 h1.52 r90
Top Solder:
  rectangle: 33.909,58.166 42.164,61.849
  rectangle: 33.909,53.34 42.164,56.769
Mechanical 2:
  the board outline again, w0.254